# EAGLE board Project (EAGLE 9.6.2)
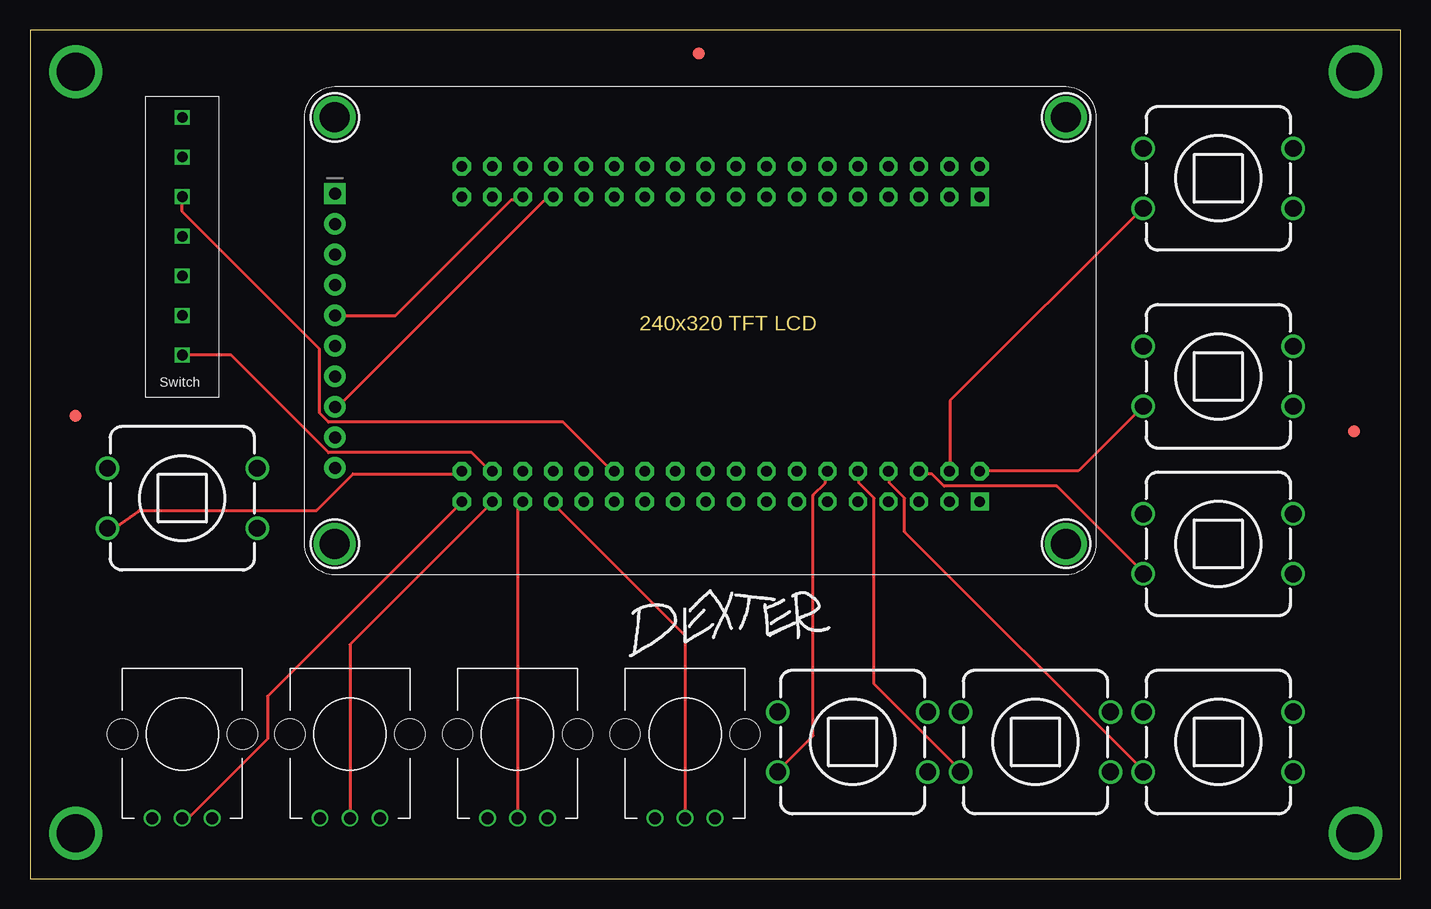
[diagram p0: board, top side]
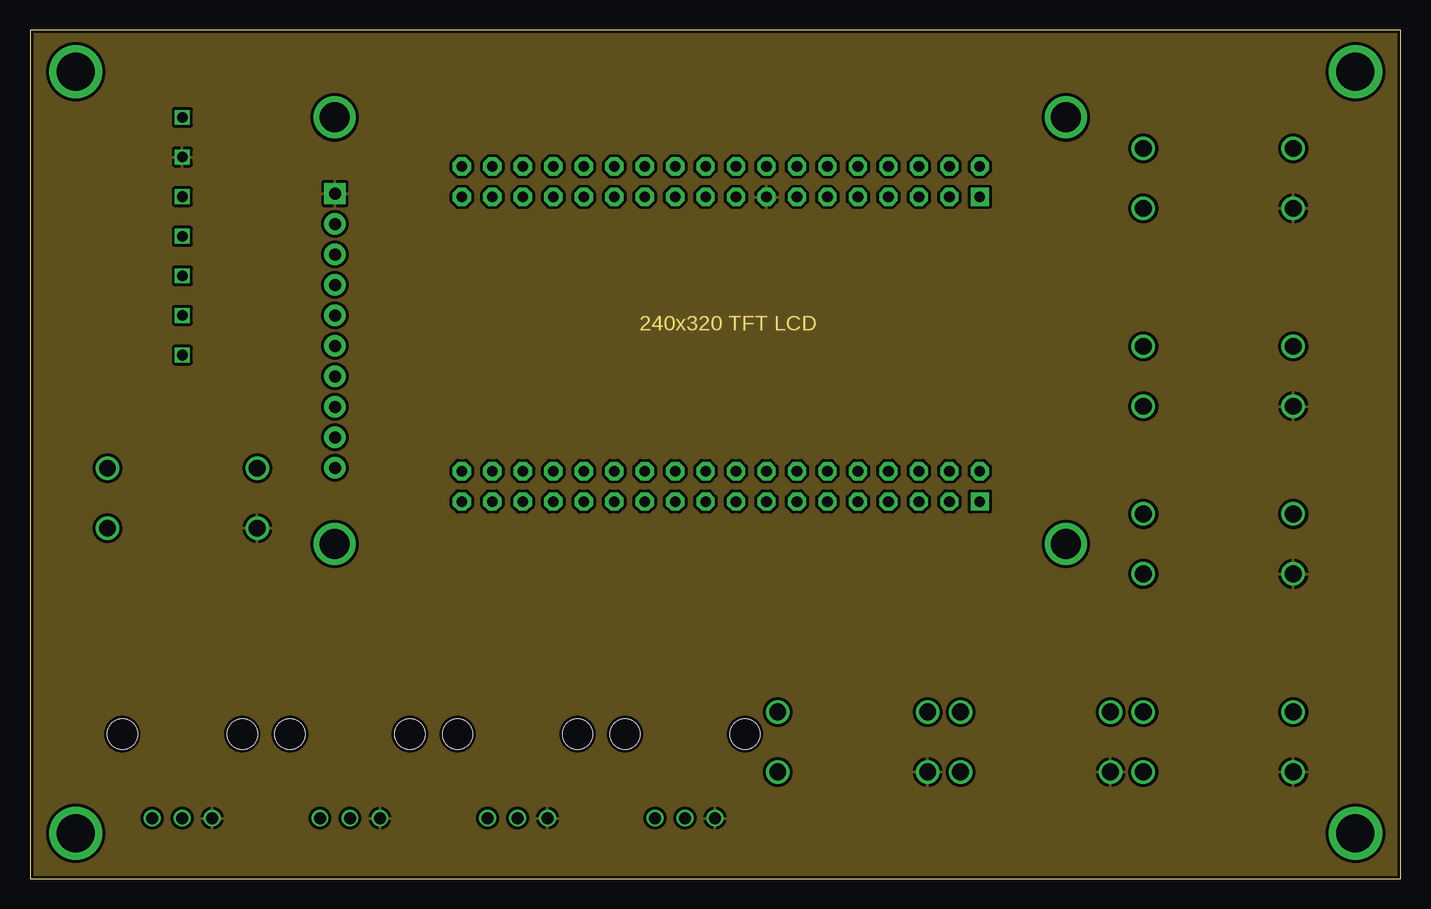
[diagram p1: board, inner layer Route2]
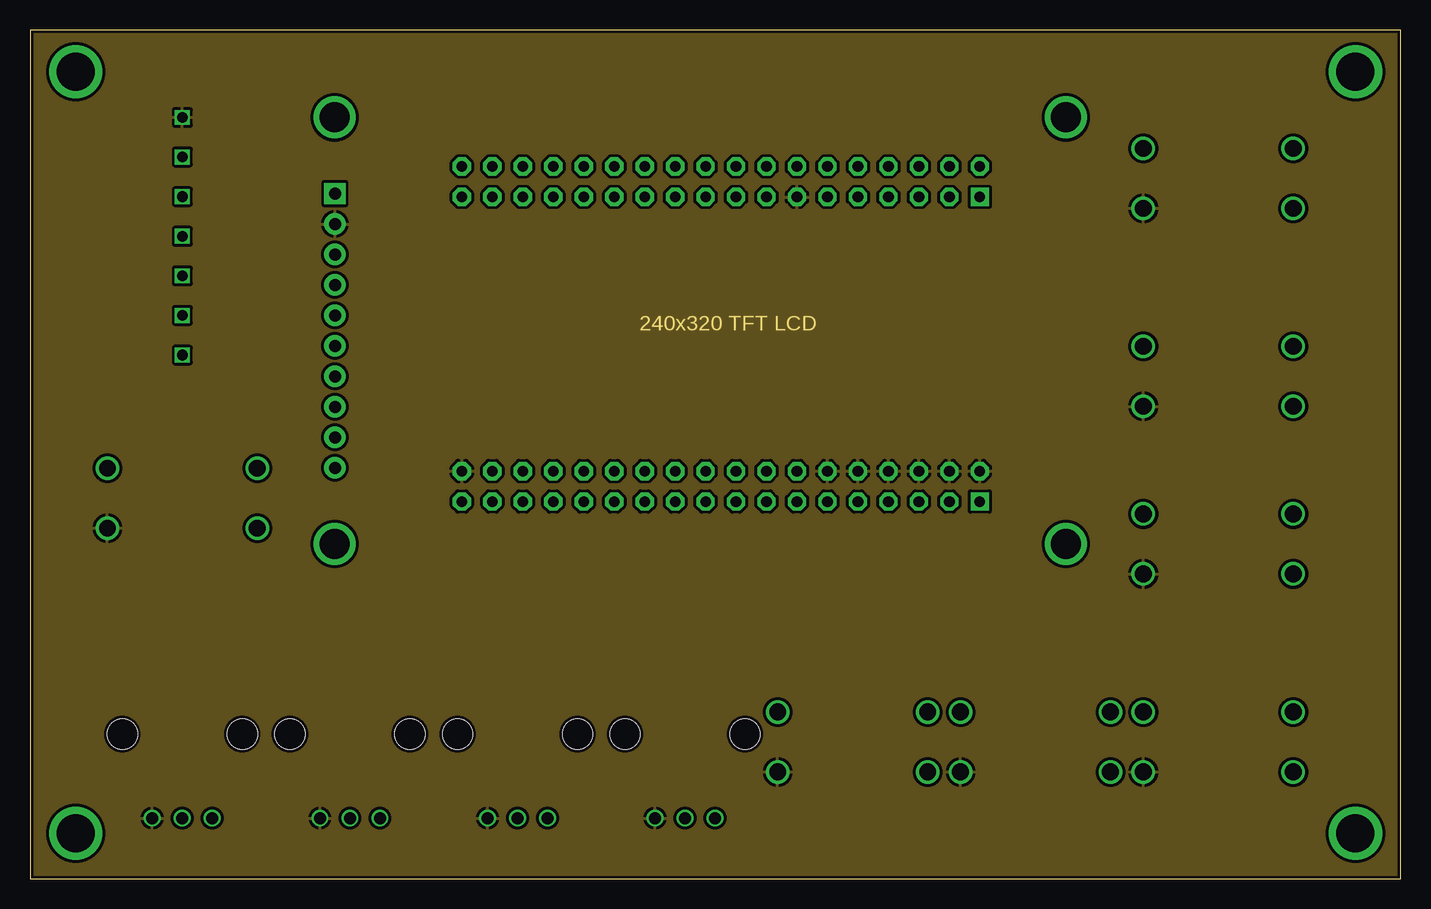
[diagram p2: board, inner layer Route15]
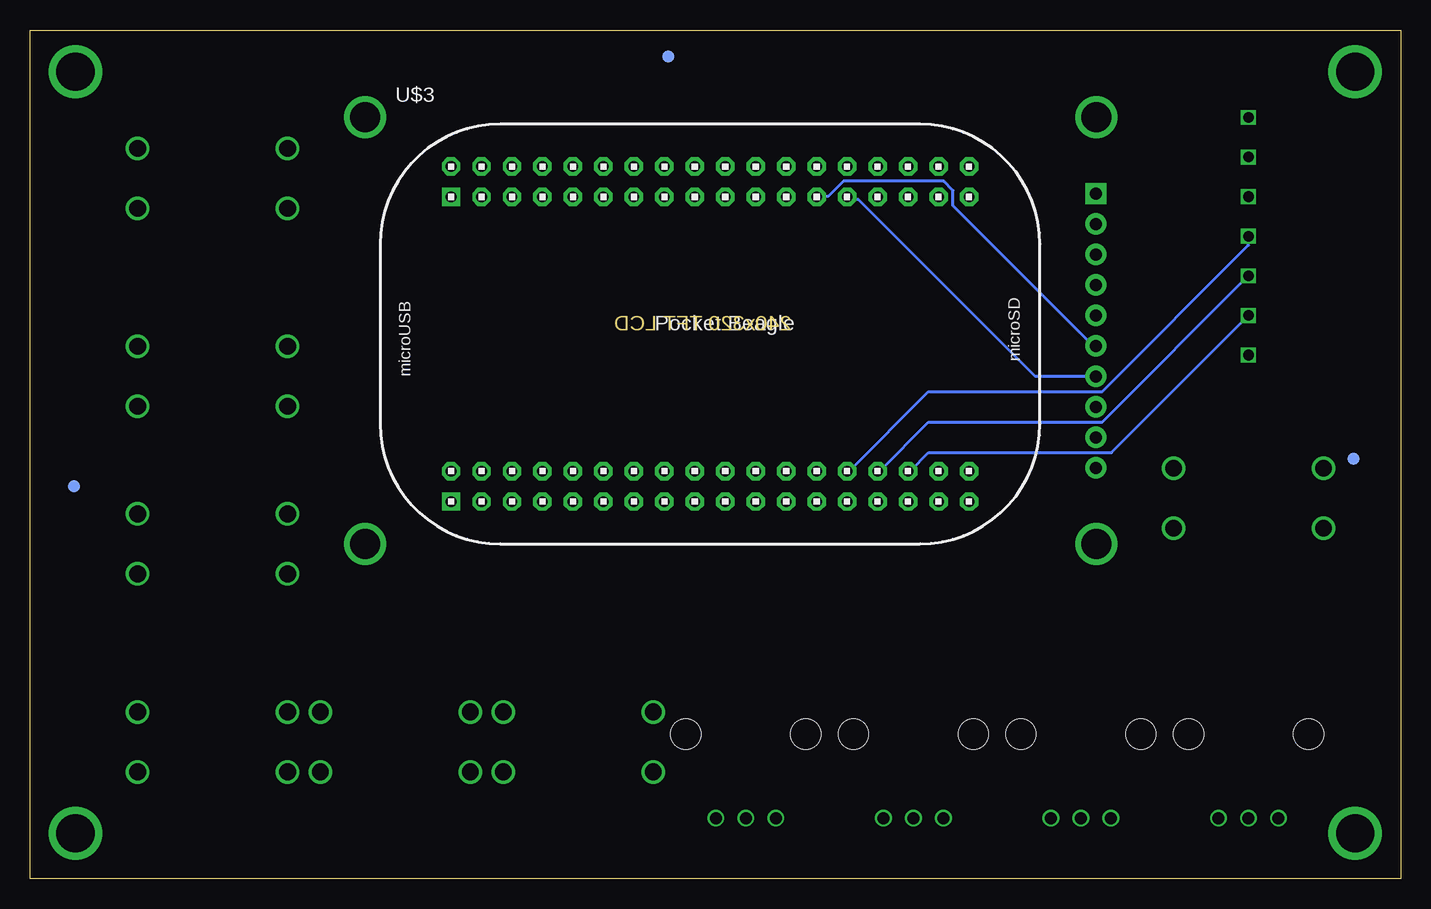
[diagram p3: board, bottom side, seen from below]

Size 114.28 x 70.79 mm. Coordinates in mm from the lower left corner, seen from the top.
Outline: 0,0 114.28,0 114.28,70.79 0,70.79 0,0
Copper layers (1*2*15*16): Top 0.035mm / dielectric 0.23mm / Route2 0.035mm / dielectric 0.93mm / Route15 0.035mm / dielectric 0.23mm / Bottom 0.035mm
Design rules "ENGI301_4lyr (1)": minimum track width 10mil, minimum drill 12mil, track to track 10mil, track to pad 10mil, pad to pad 10mil, via to via 10mil, smd to smd 10mil, copper to edge 10mil, drill to drill 12mil, minimum pad ring 6mil, minimum via ring 6mil, stop-mask expansion 3mil, vias tented up to drill 25mil, thermal gap 10mil

## Footprints (pad centres in the part's own frame; a part is rotated, then mirrored left to right if it is on the bottom)
FIDUCIAL_40MIL = smd 1.016 x 1.016: P$1 0,0
MOUNTING_HOLE = drill 3.175 pad 4.445: P$1 0,0
POT-PO90S = drill 1: CCW -2.5,0; CW 2.5,0; S 0,0 | hole 2.5: -5,7; 5,7
BUTTON_12.5MM = drill 1.4: 1 -6.25,2.5; 2 -6.25,-2.5; 3 6.25,2.5; 4 6.25,-2.5
SCREEN = drill 1 pad 1.778 square: 1@JP1 -11.43,-33 | drill 1 pad 1.778: 2@JP1 -8.89,-33; 3@JP1 -6.35,-33; 4@JP1 -3.81,-33; 5@JP1 -1.27,-33; 6@JP1 1.27,-33; 7@JP1 3.81,-33; 8@JP1 6.35,-33; 9@JP1 8.89,-33; 10@JP1 11.43,-33 | drill 2.5 pad 3.2: P$1@U$2 -17.78,-33.02; P$1@U$3 17.78,27.94; P$1@U$4 -17.78,27.94; P$1@U$5 17.78,-33.02
SELECTOR_SWITCH = drill 0.889 square: P$1 0,12.7; P$2 0,9.398; P$3 0,6.096; P$4 0,2.794; P$5 0,-0.508; P$6 0,-3.81; P$7 0,-7.112
POCKETBEAGLE = drill 0.889 pad 1.524 square: 1@P1 5.91,3.53; 1@P2 5.91,28.93 | drill 0.889 pad 1.524 octagon: 2@P1 5.91,6.07; 2@P2 5.91,31.47; 3@P1 8.45,3.53; 3@P2 8.45,28.93; 4@P1 8.45,6.07; 4@P2 8.45,31.47; 5@P1 10.99,3.53; 5@P2 10.99,28.93; 6@P1 10.99,6.07; 6@P2 10.99,31.47; 7@P1 13.53,3.53; 7@P2 13.53,28.93; 8@P1 13.53,6.07; 8@P2 13.53,31.47; 9@P1 16.07,3.53; 9@P2 16.07,28.93; 10@P1 16.07,6.07; 10@P2 16.07,31.47; 11@P1 18.61,3.53; 11@P2 18.61,28.93; 12@P1 18.61,6.07; 12@P2 18.61,31.47; 13@P1 21.15,3.53; 13@P2 21.15,28.93; 14@P1 21.15,6.07; 14@P2 21.15,31.47; 15@P1 23.69,3.53; 15@P2 23.69,28.93; 16@P1 23.69,6.07; 16@P2 23.69,31.47; 17@P1 26.23,3.53; 17@P2 26.23,28.93; 18@P1 26.23,6.07; 18@P2 26.23,31.47; 19@P1 28.77,3.53; 19@P2 28.77,28.93; 20@P1 28.77,6.07; 20@P2 28.77,31.47; 21@P1 31.31,3.53; 21@P2 31.31,28.93; 22@P1 31.31,6.07; 22@P2 31.31,31.47; 23@P1 33.85,3.53; 23@P2 33.85,28.93; 24@P1 33.85,6.07; 24@P2 33.85,31.47; 25@P1 36.39,3.53; 25@P2 36.39,28.93; 26@P1 36.39,6.07; 26@P2 36.39,31.47; 27@P1 38.93,3.53; 27@P2 38.93,28.93; 28@P1 38.93,6.07; 28@P2 38.93,31.47; 29@P1 41.47,3.53; 29@P2 41.47,28.93; 30@P1 41.47,6.07; 30@P2 41.47,31.47; 31@P1 44.01,3.53; 31@P2 44.01,28.93; 32@P1 44.01,6.07; 32@P2 44.01,31.47; 33@P1 46.55,3.53; 33@P2 46.55,28.93; 34@P1 46.55,6.07; 34@P2 46.55,31.47; 35@P1 49.09,3.53; 35@P2 49.09,28.93; 36@P1 49.09,6.07; 36@P2 49.09,31.47

## Placement (x,y rotation side)
FUD1  FIDUCIAL  [FIDUCIAL_40MIL]  3.81,38.61 0 top
FUD2  FIDUCIAL  [FIDUCIAL_40MIL]  55.75,68.83 0 top
FUD3  FIDUCIAL  [FIDUCIAL_40MIL]  110.36,37.34 0 top
FUD4  FIDUCIAL  [FIDUCIAL_40MIL]  3.94,35.05 0 bottom
FUD5  FIDUCIAL  [FIDUCIAL_40MIL]  110.62,32.77 0 bottom
FUD6  FIDUCIAL  [FIDUCIAL_40MIL]  61.09,68.58 0 bottom
MGT1  MOUNTING_HOLE  [MOUNTING_HOLE]  110.49,67.31 0 top
MGT2  MOUNTING_HOLE  [MOUNTING_HOLE]  110.49,3.81 0 top
MGT3  MOUNTING_HOLE  [MOUNTING_HOLE]  3.81,67.31 0 top
MGT4  MOUNTING_HOLE  [MOUNTING_HOLE]  3.81,3.81 0 top
R1  PMETER  [POT-PO90S]  12.7,5.08 0 top
R2  PMETER  [POT-PO90S]  26.67,5.08 0 top
R3  PMETER  [POT-PO90S]  40.64,5.08 0 top
R4  PMETER  [POT-PO90S]  54.61,5.08 0 top
SW1  PUSH_BUTTON  [BUTTON_12.5MM]  12.7,31.75 0 top
SW2  PUSH_BUTTON  [BUTTON_12.5MM]  68.58,11.43 0 top
SW3  PUSH_BUTTON  [BUTTON_12.5MM]  83.82,11.43 0 top
SW4  PUSH_BUTTON  [BUTTON_12.5MM]  99.06,11.43 0 top
SW5  PUSH_BUTTON  [BUTTON_12.5MM]  99.06,27.94 0 top
SW6  PUSH_BUTTON  [BUTTON_12.5MM]  99.06,58.42 0 top
SW7  PUSH_BUTTON  [BUTTON_12.5MM]  99.06,41.91 0 top
U$1  SCREEN  [SCREEN]  58.42,45.72 270 top
U$2  SELECTOR_SWITCH  [SELECTOR_SWITCH]  12.7,50.8 0 top
U$3  POCKETBEAGLE  [POCKETBEAGLE]  85.09,27.94 0 bottom

## Library data of the parts
FUD1-FUD6 MGT1-MGT4 R1-R4 SW1-SW7 U$1-U$3 = Project

## Nets
GND: R1.CW R2.CW R3.CW R4.CW SW1.4 SW2.4 SW3.4 SW4.4 SW5.4 SW6.4 SW7.4 U$1.1@JP1 U$2.P$2 U$3.15@P2
N$2: U$2.P$3 U$3.26@P1
N$3: U$2.P$4 U$3.28@P1
N$4: U$2.P$5 U$3.30@P1
N$5: U$2.P$6 U$3.32@P1
N$6: R3.S U$3.31@P1
N$7: R2.S U$3.33@P1
N$8: R1.S U$3.35@P1
N$15: U$2.P$7 U$3.34@P1
N$16: R4.S U$3.29@P1
N$17: U$1.6@JP1 U$3.25@P2
N$18: U$1.7@JP1 U$3.27@P2
N$19: U$1.8@JP1 U$3.29@P2
N$20: U$1.5@JP1 U$3.31@P2
VDD_5V: R1.CCW R2.CCW R3.CCW R4.CCW SW1.2 SW2.2 SW3.2 SW4.2 SW5.2 SW6.2 SW7.2 U$1.2@JP1 U$2.P$1 U$3.2@P1 U$3.4@P1 U$3.6@P1 U$3.8@P1 U$3.10@P1 U$3.12@P1 U$3.13@P2 U$3.36@P1

## Tracks (layer width: path | path; a pad name or v marks a point on that pad's centre or on a via)
GND
  pour Route2: -3.81,73.66 118.11,73.66 118.11,-2.54 -1.27,-2.54 -3.81,0
N$2
  Top 0.254: U$2.P$3 12.7,55.63 24.13,44.2 24.13,38.86 24.89,38.1 44.45,38.1 48.51,34.04 U$3.26@P1
N$3
  Bottom 0.254: U$2.P$4 12.7,52.83 24.89,40.64 39.37,40.64 45.97,34.04 U$3.28@P1
N$4
  Bottom 0.254: U$2.P$5 24.89,38.1 39.37,38.1 43.43,34.04 U$3.30@P1
N$5
  Bottom 0.254: U$2.P$6 24.13,35.56 39.37,35.56 40.89,34.04 U$3.32@P1
N$6
  Top 0.254: R3.S 40.64,30.99 40.89,31.24 U$3.31@P1
N$7
  Top 0.254: R2.S 26.67,19.56 38.35,31.24 U$3.33@P1
N$8
  Top 0.254: R1.S 13.21,5.08 19.81,11.68 19.81,15.24 35.81,31.24 U$3.35@P1
N$15
  Top 0.254: U$2.P$7 16.76,43.69 24.89,35.56 36.83,35.56 38.35,34.04 U$3.34@P1
N$16
  Top 0.254: R4.S 54.61,20.32 43.69,31.24 U$3.29@P1
N$17
  Bottom 0.254: U$3.25@P2 48.51,56.9 47.75,56.9 46.48,58.17 38.1,58.17 37.34,57.4 37.34,56.13 25.65,44.45 U$1.6@JP1
N$18
  Bottom 0.254: U$1.7@JP1 30.48,41.91 45.21,56.64 45.97,56.64 U$3.27@P2
N$19
  Top 0.254: U$3.29@P2 43.43,56.64 42.93,56.64 25.65,39.37 U$1.8@JP1
N$20
  Top 0.254: U$1.5@JP1 30.48,46.99 40.13,56.64 40.89,56.64 U$3.31@P2
VDD_5V
  Top 0.254: U$3.12@P1 66.29,33.78 66.29,33.02 65.28,32 65.28,11.94 62.48,9.14 SW2.2 | U$3.10@P1 69.09,33.78 69.09,33.02 70.36,31.75 70.36,16.26 77.47,9.14 SW3.2 | U$3.8@P1 71.63,33.78 71.63,33.02 72.9,31.75 72.9,28.96 92.71,9.14 SW4.2 | U$3.6@P1 74.17,33.78 75.18,33.78 76.2,32.77 85.6,32.77 92.71,25.65 SW5.2 | U$3.4@P1 76.71,34.04 76.71,39.88 92.71,55.88 SW6.2 | U$3.2@P1 79.25,34.04 87.38,34.04 92.71,39.37 SW7.2 | U$3.36@P1 35.81,33.78 26.92,33.78 23.88,30.73 9.14,30.73 7.08,29.25 SW1.2
  pour Route15: -6.35,76.2 121.92,76.2 121.92,-3.81 -5.08,-3.81 -6.35,-2.54

## Text on the board
tPlace: C:/Users/kiran/Downloads/dexter.bmp
200bmp: C:/Users/kiran/Downloads/dexter.bmp